# Altium PCB RS_RF02.PcbDoc
Units mm, origin at the board's own origin, x right, y up, seen from the top; angles counter-clockwise.
Board outline 43 x 71 mm, 2 copper layers (Top Layer, Bottom Layer); 80 components, 52 nets, 269 pads, 197 vias.
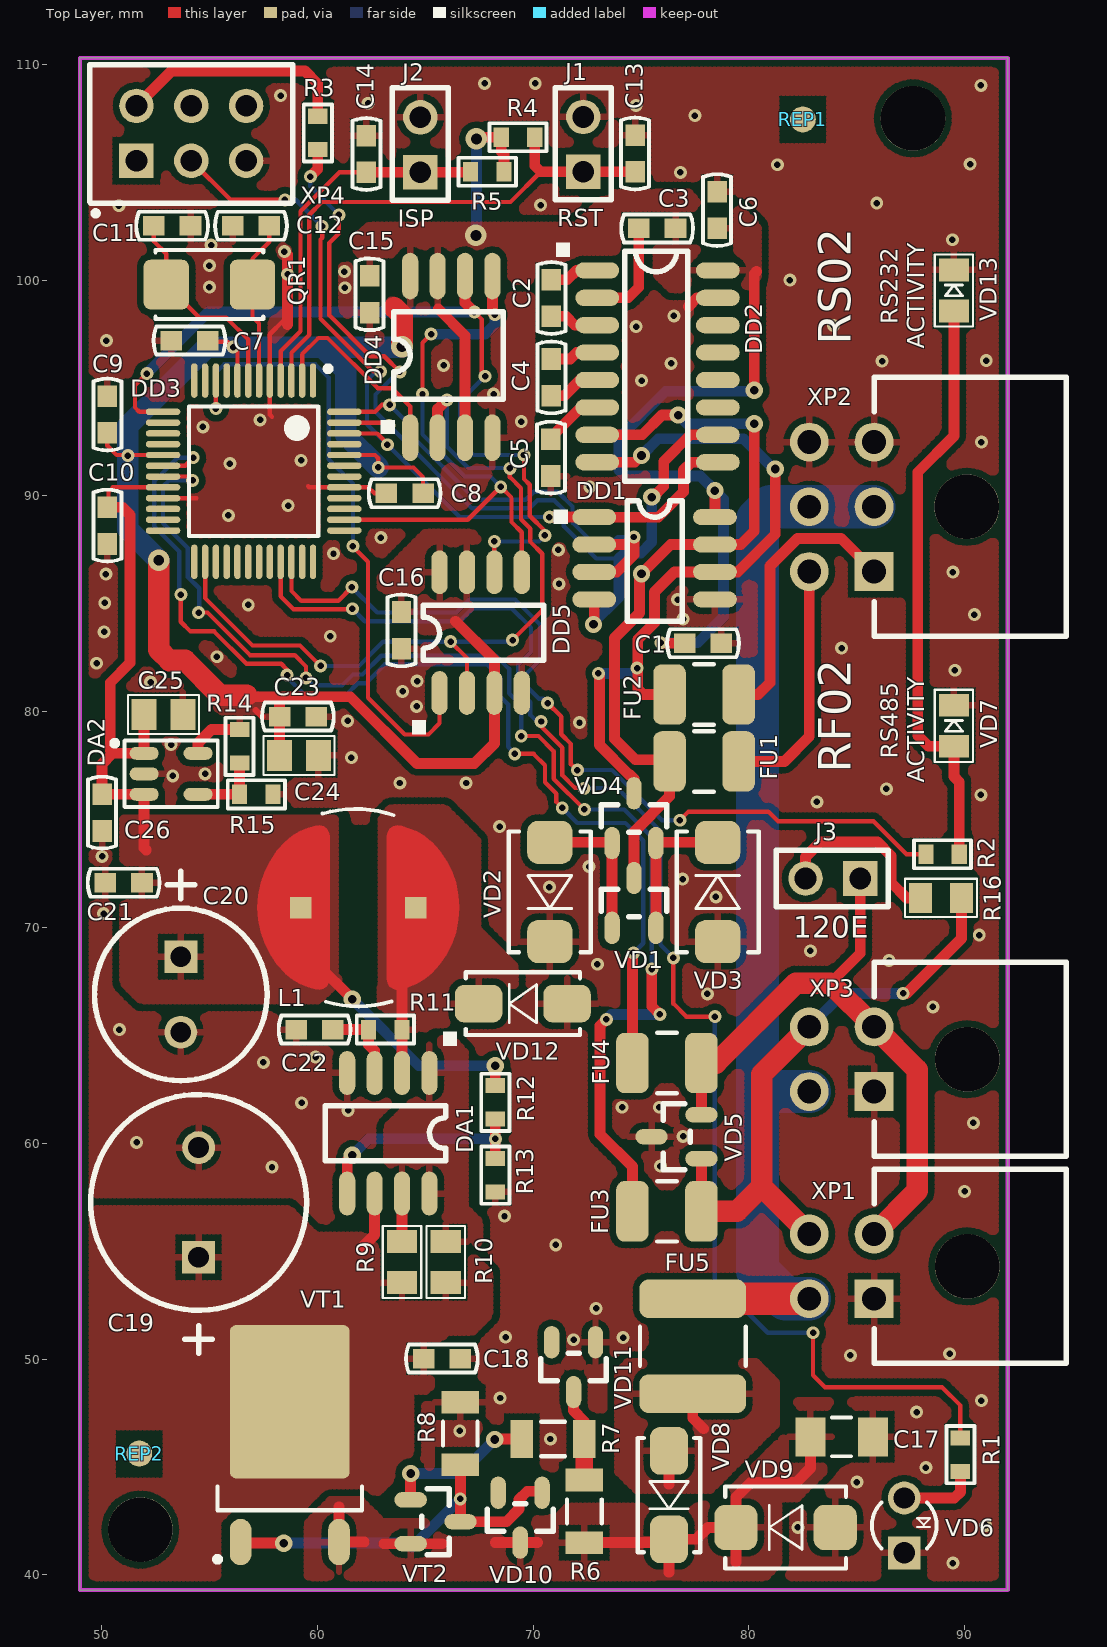
[diagram p0: Top Layer view]
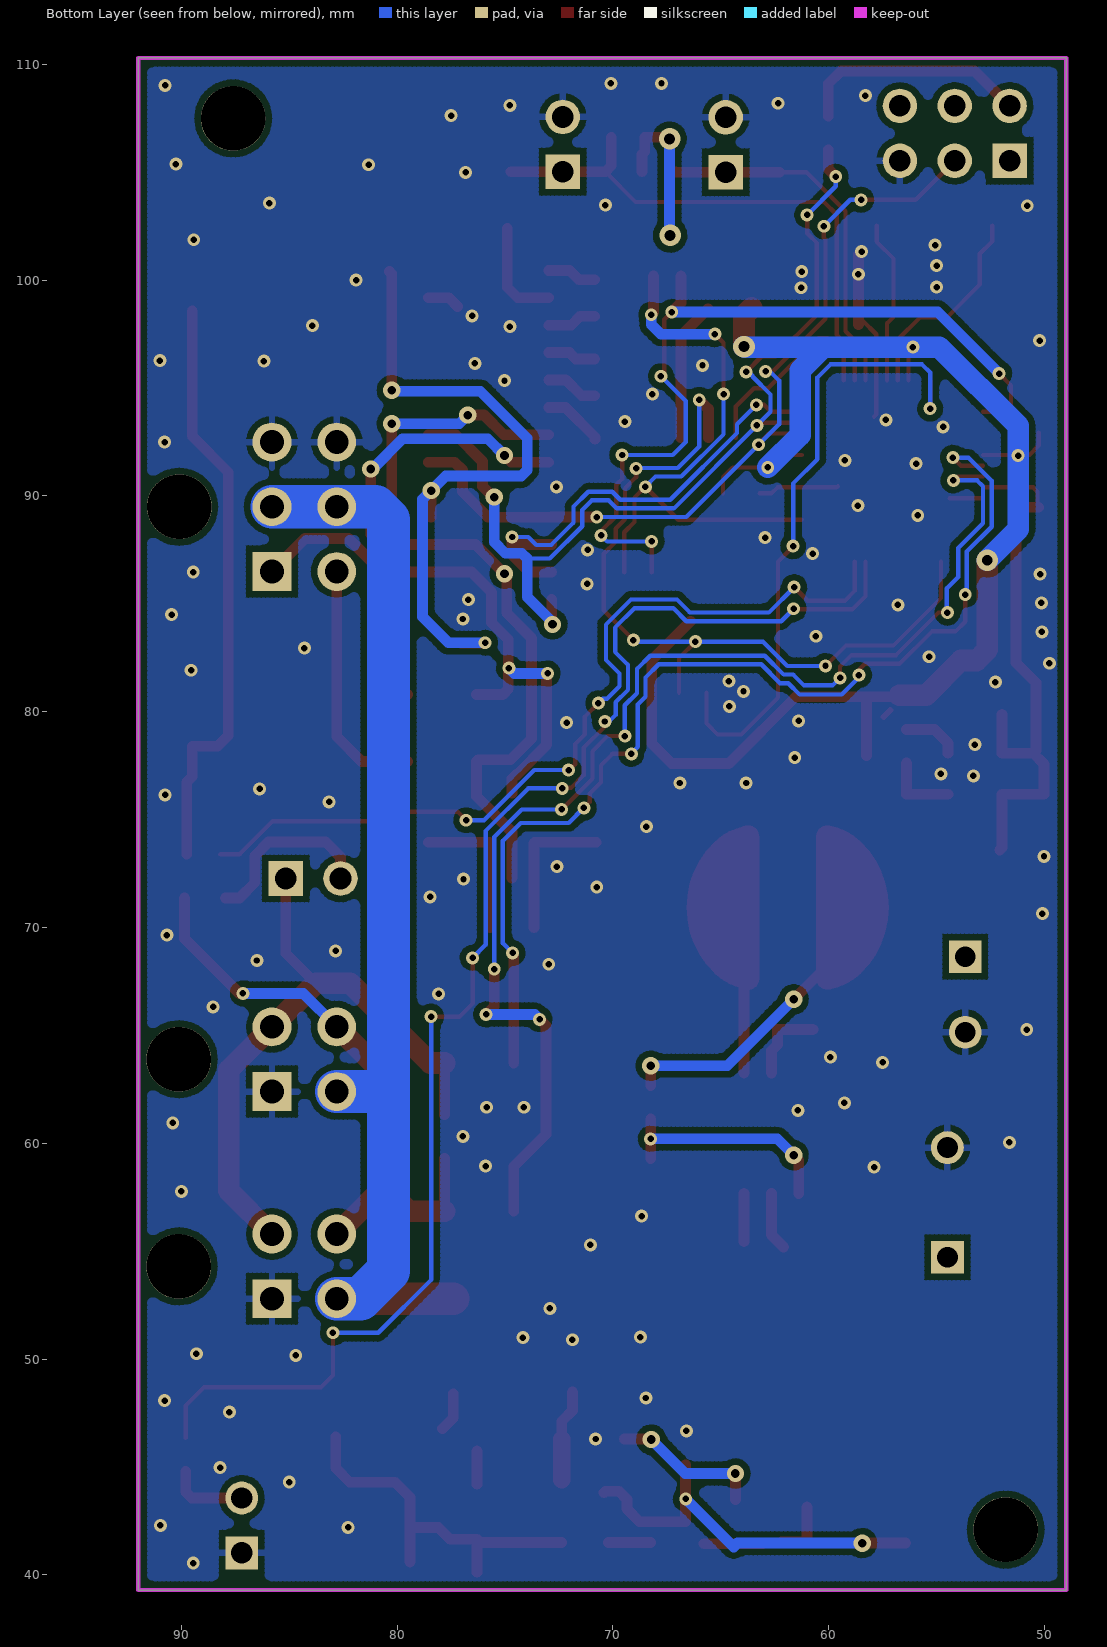
[diagram p1: Bottom Layer view, seen from below]

## Layer stack, top to bottom
Top Solder: solder mask 0.0102, Solder Resist, Dk 3.5
Top Layer: signal copper 0.0356
Dielectric 1: dielectric 0.32, FR-4, Dk 4.8
Bottom Layer: signal copper 0.0356
Bottom Solder: solder mask 0.0102, Solder Resist, Dk 3.5

## Board outline
49,39.3 49,110.3 92,110.3 92,39.3

## Design rules (kind name [scope] priority, off if disabled: settings)
Clearance Clearance_1 [InPolygon] p1: gap=0.3 ignorepadtopadclearanceinfootprint=FALSE
Clearance [All] p2: gap=0.2 ignorepadtopadclearanceinfootprint=FALSE
HoleSize [All] p1: absolutevalues=TRUE maxlimit=10 minlimit=0.025 maxpercent=80.000 minpercent=20.000
HoleToHoleClearance [All] p1: gap=0.2 allowstackedmicrovias=TRUE
MinimumSolderMaskSliver [All] p1: minsoldermaskwidth=0.05
PolygonConnect PolygonConnect_1 [IsVia OR InComponent('VT1') AND InNet('VIN_F')] p1: connectstyle=Direct reliefconductorwidth=0.254 reliefentries=4 polygonreliefangle="90 Angle" airgapwidth=0.254
PolygonConnect [All] p2: connectstyle=Relief reliefconductorwidth=0.3 reliefentries=4 polygonreliefangle="90 Angle" airgapwidth=0.3
RoutingVias [All] p1: holewidth=0.4 width=0.8 viastyle="Through Hole" minholewidth=0.3 minwidth=0.6 maxholewidth=0.5 maxwidth=1
SilkToSilkClearance [All] p1: silktosilkclearance=0.1
SilkToSolderMaskClearance [IsPad] p1: minsilkscreentomaskgap=0.1 clearancetoexposedcopper=TRUE
SolderMaskExpansion [All] p1: expansion=0.102
Width [All] p1: maxlimit=3 minlimit=0.2 preferedwidth=0.5
25 further rules are at their usual default settings.

## Classes and differential pairs
component class Power: C17 C18 C19 C20 C21 C22 C23 C24 C25 C26 DA1 DA2 FU5 L1 R6 R7 R8 R9 R10 R11 R12 R13 R14 R15 VD8 VD9 VD10 VD11 VD12 VT1 VT2
component class Memory: C15 C16 DD4 DD5
component class MCU: C7 C8 C9 C10 C11 C12 C13 C14 DD3 J1 J2 QR1 R1 R2 R3 R4 R5 REP1 REP2 VD6 VD7 VD13 XP4
component class Interface: C1 C2 C3 C4 C5 C6 DD1 DD2 FU1 FU2 FU3 FU4 J3 R16 VD1 VD2 VD3 VD4 VD5 XP1 XP2 XP3

## Components (designator, comment, footprint, x,y, rotation, side; value= is the part's Value field where it differs from the comment)
C1 "0.1uF" CC0603 77.875,83.175 r0 top
C2 "0.1uF" CC0603 70.85,99.175 r90 top
C3 "0.1uF" CC0603 75.75,102.4 r0 top
C4 "0.1uF" CC0603 70.85,95.5 r90 top
C5 "0.1uF" CC0603 70.825,91.775 r270 top
C6 "0.1uF" CC0603 78.525,103.25 r270 top
C7 "0.1uF" CC0603 54.075,97.2 r0 top
C8 "0.1uF" CC0603 64.05,90.125 r180 top
C9 "0.1uF" CC0603 50.273,93.775 r270 top
C10 "0.1uF" CC0603 50.275,88.625 r90 top
C11 "22pF" CC0603 53.275,102.525 r180 top
C12 "22pF" CC0603 56.925,102.523 r0 top
C13 "200pF" CC0603 74.725,105.875 r270 top
C14 "200pF" CC0603 62.275,105.85 r270 top
C15 "0.1uF" CC0603 62.425,99.35 r270 top
C16 "0.1uF" CC0603 63.9,83.775 r270 top
C17 "0.1uF" CC1206 84.3,46.4 r180 top
C18 "0.1uF" CC0603 65.775,50.025 r180 top
C19 "470uFx35V" CC16X10_CAP0.5(1)(Primary) 54.5,54.725 r90 top
C20 "1000uFx6.3V" CC8X3.5 53.675,68.65 r270 top
C21 "0.1uF" CC0603 51.025,72.075 r0 top
C22 "300pF" CC0603 59.875,65.275 r0 top
C23 "0.1uF" CC0603 59.1,79.775 r0 top
C24 "10uFx6.3V" CC0805 59.15,77.975 r180 top
C25 "4.7uF 6.3V" CC0805 52.875,79.875 r180 top
C26 "0.1uF" CC0603 50.025,75.325 r270 top
DA1 "MC34063" SO-8 65.195,63.263 r180 top
DA2 "AP2210K-ADJTRG1" SOT23-5 53.225,77.125 r0 top
DD1 "ST3485EBDR" SO-8 72.837,89.02 r270 top
DD2 "MAX3232" SO16_M 72.975,100.455 r0 top
DD3 "LPC11C24FBD48" LQFP-48 57.05,91.15 r270 top
DD4 "M25PE16" EIAJ_SO8 64.305,92.7 r90 top
DD5 "FM25CL64-G" SO-8 65.665,80.875 r0 top
FU1 "MICROSMD010F" RC1210 77.925,77.7 r0 top
FU2 "MICROSMD010F" RC1210 77.925,80.8 r0 top
FU3 "MICROSMD010F-2" RC1210 76.2,56.85 r180 top
FU4 "MICROSMD010F-2" RC1210 76.2,63.725 r180 top
FU5 "MF-SMDF050" MF-SMDF 77.4,50.6 r270 top
J1 "PLS-02" PLS-02 72.325,105.025 r90 top
J2 "PLS-02" PLS-02 64.775,105.01 r90 top
J3 "PLS-02" PLS-02 85.165,72.275 r180 top
L1 "220uH" SDR0805 61.9,70.925 r0 top
QR1 "NX5032GA-12.000MHz LN-CD-1" AC5032_2 55,99.8 r180 top
R1 "330E" RC0603 89.8,45.575 r270 top
R2 "330E" RC0603 88.975,73.4 r0 top
R3 "100E" RC0603 60.025,106.825 r90 top
R4 "10k" RC0603 69.3,106.625 r180 top
R5 "10k" RC0603 67.875,105.025 r0 top
R6 "220k" RC1206 72.375,42.95 r270 top
R7 "220k" RC1206 70.925,46.3 r180 top
R8 "220k" RC1206 66.625,46.55 r90 top
R9 "1E" RC0805 63.925,54.5 r270 top
R10 "1E" RC0805 65.95,54.5 r270 top
R11 "560k" RC0603 63.15,65.275 r180 top
R12 "3k 1%" RC0603 68.25,61.9 r270 top
R13 "1k 1%" RC0603 68.25,58.525 r90 top
R14 "11k 1%" RC0603 56.4,78.4 r90 top
R15 "18k 1%" RC0603 57.175,76.175 r180 top
R16 "120E" RC0805 88.9,71.375 r0 top
REP1 "REPER_POINT_1.2" REPER1.2 82.5,107.45 r90 top
REP2 "REPER_POINT_1.2" REPER1.2 51.75,45.625 r90 top
VD1 "BAV99" SOT-23(GSD) 73.659,69.976 r0 top
VD2 "SMBJ5.0A" SMB 70.775,71.65 r90 top
VD3 "SMBJ5.0A" SMB 78.55,71.65 r270 top
VD4 "BAV99" SOT-23(GSD) 73.659,73.901 r0 top
VD5 "PESD2CAN" SOT-23(123) 77.813,59.293 r0 top
VD6 "BL-B45V1-L" LED3 87.2,41.025 r90 top
VD7 "BL-HGE35A-AV-TRB" LED0805 89.5,78.4 r90 top
VD8 "GS1M" SMA 76.3,43.7 r270 top value={Value}
VD9 "SMBJ150A" SMB 81.7,42.2 r0 top
VD10 "BZX84C15" SOT-23(123) 70.416,43.824 r90 top value={Value}
VD11 "BZX84C39" SOT-23(123) 72.891,50.799 r90 top value={Value}
VD12 "SS14" SMA 69.525,66.475 r180 top
VD13 "n.p" LED0805 89.5,98.575 r90 top
VT1 "FQD5P20TM" D-PAK(TO-252AA) 58.725,46.025 r90 top
VT2 "BC807-40" SOT-23(123) 64.312,43.482 r180 top
XP1 "MIF2X02PRP" MIF2X02PRP 85.8,52.8 r0 top
XP2 "MIF2X03PRP" MIF2X03PRP 85.8,86.5 r0 top
XP3 "MIF2X02PRP" MIF2X02PRP 85.8,62.4 r0 top
XP4 "PLD-06" PIN6 51.62,105.535 r0 top

## Footprints (in the part's own frame and the unit in brackets; to place one, negate y for a bottom-side part, rotate by r counter-clockwise, add the part's x,y. Pads: shape width x height; smd on the part's side, far side on the other; paste and mask are expansions set on the pad)
AC5032_2 [mm]
  rrect30% 2.1x2.3 smd mask+0.05: 1(-2,0) 2(2,0)
  silkscreen extent -2.5,-1.6 2.5,1.6
CC8X3.5 [mil]
  rect 60x60 hole 38 mask+1.97: 1(0,0)
  round 60 hole 38 mask+1.97: 2(137.8,0)
  silkscreen extent -156,-157 226,157
CC16X10_CAP0.5(1)(Primary) [mil]
  round 60 hole 38 mask+1.97: 1(200,0)
  rect 60x60 hole 38 mask+1.97: 2(0,0)
  silkscreen extent -175,-197 297,197
CC0603 [mm]
  rect 1x0.9 smd paste-25.4 mask+0.05: 1(-0.85,0) 2(0.85,0)
  silkscreen extent -1.66,-0.65 1.66,0.65
CC0805 [mm]
  rect 1.15x1.45 smd paste-25.4 mask+0.05: 1(-0.9,0) 2(0.9,0)
  silkscreen extent -1.65,-0.9 1.65,0.9
CC1206 [mm]
  rect 1.4x1.8 smd paste-25.4 mask+0.05: 1(-1.45,0) 2(1.45,0)
  silkscreen extent -0.45,-0.9 0.45,0.9
D-PAK(TO-252AA) [mm]
  oval 2.15x1 smd paste+0.076 mask+0.076: 1(-4.5,2.28) 3(-4.5,-2.28)
  rrect10% 7.1x5.55 smd paste-4: 2(2,0)
  silkscreen extent -5.42,-3.35 -1.92,3.47
EIAJ_SO8 [mil]
  oval 85x29.53 smd mask+1.97: 1(0,0) 2(0,-50) 3(0,-100) 4(0,-150) 5(295,-150) 6(295,-100) 7(295,-50) 8(295,0)
  silkscreen extent 7,-170 230,53
LED3 [mil]
  rect 60x60 hole 39 mask+1.97: 1(0,0)
  round 60 hole 39 mask+1.97: 2(100,0)
  silkscreen extent 8,-59 92,59
LED0805 [mm]
  rect 1.05x1.4 smd paste-25.4 mask+0.05: 1(0,0) 2(1.9,0)
  silkscreen extent -0.72,-0.89 2.62,0.89
LQFP-48 [mm]
  oval 1.6x0.3 smd mask+0.05: 1(-4.2,2.75) 2(-4.2,2.25) 3(-4.2,1.75) 4(-4.2,1.25) 5(-4.2,0.75) 6(-4.2,0.25) 7(-4.2,-0.25) 8(-4.2,-0.75) 9(-4.2,-1.25) 10(-4.2,-1.75) 11(-4.2,-2.25) 12(-4.2,-2.75) 25(4.2,-2.75) 26(4.2,-2.25) 27(4.2,-1.75) 28(4.2,-1.25) 29(4.2,-0.75) 30(4.2,-0.25) 31(4.2,0.25) 32(4.2,0.75) 33(4.2,1.25) 34(4.2,1.75) 35(4.2,2.25) 36(4.2,2.75)
  oval 0.3x1.6 smd mask+0.05: 13(-2.75,-4.2) 14(-2.25,-4.2) 15(-1.75,-4.2) 16(-1.25,-4.2) 17(-0.75,-4.2) 18(-0.25,-4.2) 19(0.25,-4.2) 20(0.75,-4.2) 21(1.25,-4.2) 22(1.75,-4.2) 23(2.25,-4.2) 24(2.75,-4.2) 37(2.75,4.2) 38(2.25,4.2) 39(1.75,4.2) 40(1.25,4.2) 41(0.75,4.2) 42(0.25,4.2) 43(-0.25,4.2) 44(-0.75,4.2) 45(-1.25,4.2) 46(-1.75,4.2) 47(-2.25,4.2) 48(-2.75,4.2)
  silkscreen extent -4.87,-3 3,3.58
MF-SMDF [mm]
  rrect50% 1.8x4.95 smd mask+0.05: 1(-2.2,0) 2(2.2,0)
  silkscreen extent -0.9,-2.45 0.9,2.45
MIF2X02PRP [mm]
  rect 1.8x1.8 hole 1.1 mask+0.05: 1(0,0)
  round 1.8 hole 1.1 mask+0.05: 2(0,3) 3(-3,0) 4(-3,3)
  round 3 hole 3 unplated mask+0.05: 5(4.32,1.5)
  silkscreen extent 0,-3 8.9,6
MIF2X03PRP [mm]
  rect 1.8x1.8 hole 1.1 mask+0.05: 1(0,0)
  round 1.8 hole 1.1 mask+0.05: 2(0,3) 3(0,6) 4(-3,0) 5(-3,3) 6(-3,6)
  round 3 hole 3 unplated mask+0.05: 7(4.3,3)
  silkscreen extent 0,-3 8.9,9
PIN6 [mm]
  rect 1.6x1.6 hole 1 mask+0.05: 1(0,0)
  round 1.6 hole 1 mask+0.05: 2(0,2.54) 3(2.54,0) 4(2.54,2.54) 5(5.08,0) 6(5.08,2.54)
  silkscreen extent -2.16,-1.96 7.24,4.44
PLS-02 [mm]
  rect 1.6x1.6 hole 1 mask+0.05: 1(0,0)
  round 1.6 hole 1 mask+0.05: 2(2.54,0)
  silkscreen extent -1.3,-1.3 3.9,1.3
RC0603 [mm]
  rect 0.7x0.9 smd paste-25.4 mask+0.05: 1(-0.775,0) 2(0.774,0)
  silkscreen extent -1.32,-0.65 1.33,0.65
RC0805 [mm]
  rect 1.05x1.4 smd paste-25.4 mask+0.05: 1(-0.95,0) 2(0.95,0)
  silkscreen extent -1.67,-0.89 1.67,0.89
RC1206 [mm]
  rect 1.05x1.75 smd paste-25.4 mask+0.05: 1(-1.45,0) 2(1.45,0)
  silkscreen extent -0.55,-0.8 0.55,0.8
RC1210 [mm]
  rrect50% 1.5x2.8 smd mask+0.05: 1(-1.6,0) 2(1.6,0)
  silkscreen extent -0.45,-1.4 0.45,1.4
REPER1.2 [mm]
  round 1.2 smd paste-25.4 mask+0.05: 1(0,0)
  Top Layer pour cut-out: -1.35,-1.325 1.325,-1.325 1.325,1.325 -1.35,1.325
SDR0805 [mm]
  rect 1x1 smd paste-25.4 mask+0.05: 1(-2.667,0) 2(2.667,0)
  Top Layer region: -1.327,3.319 -1.362,3.503 -1.461,3.66 -1.612,3.771 -1.792,3.818 -1.977,3.797 -2.318,3.69 -2.706,3.535 -3.065,3.321 -3.387,3.053 -3.392,3.047 -3.771,2.627 -4.09,2.16 -4.345,1.654 -4.53,1.119 -4.642,0.565 -4.68,0 -4.642,-0.565 -4.53,-1.119 -4.345,-1.654 -4.09,-2.16 -3.771,-2.627 -3.392,-3.047 -3.381,-3.059 -3.063,-3.323 -2.709,-3.534 -2.325,-3.688 -1.996,-3.791 -1.806,-3.813 -1.62,-3.764 -1.465,-3.65 -1.363,-3.488 -1.327,-3.299
  Top Layer region: 1.327,-3.319 1.362,-3.503 1.461,-3.66 1.612,-3.771 1.792,-3.818 1.977,-3.797 2.318,-3.69 2.706,-3.535 3.065,-3.321 3.387,-3.053 3.392,-3.047 3.771,-2.627 4.09,-2.16 4.345,-1.654 4.53,-1.119 4.642,-0.565 4.68,0 4.642,0.565 4.53,1.119 4.345,1.654 4.09,2.16 3.771,2.627 3.392,3.047 3.381,3.059 3.063,3.323 2.709,3.534 2.325,3.688 1.996,3.791 1.806,3.813 1.62,3.764 1.465,3.65 1.363,3.488 1.327,3.299
  silkscreen extent -1.66,-4.57 1.64,4.57
SMA [mm]
  rrect50% 2.2x1.75 smd mask+0.05: 1(-2.05,0) 2(2.05,0)
  silkscreen extent -2.65,-1.45 2.65,1.45
SMB [mm]
  rrect50% 2x2.1 smd mask+0.05: 1(2.3,0) 2(-2.3,0)
  silkscreen extent -2.8,-1.9 2.8,1.9
SO16_M [mil]
  oval 80x29.53 smd mask+1.97: 1(0,0) 2(0,-50) 3(0,-100) 4(0,-150) 5(0,-200) 6(0,-250) 7(0,-300) 8(0,-350) 9(220,-350) 10(220,-300) 11(220,-250) 12(220,-200) 13(220,-150) 14(220,-100) 15(220,-50) 16(220,0)
  silkscreen extent -75,-385 165,50
SO-8 [mil]
  oval 29.53x80 smd mask+1.97: 1(0,0) 2(50,0) 3(100,0) 4(150,0) 5(150,220) 6(100,220) 7(50,220) 8(0,220)
  silkscreen extent -50,-75 190,160
SOT23-5 [mm]
  oval 1.35x0.6 smd mask+0.05: 1(-1.25,0.95) 2(-1.25,0) 3(-1.25,-0.95) 4(1.25,-0.95) 5(1.25,0.95)
  silkscreen extent -2.74,-1.55 2.16,1.55
SOT-23(123) [mil]
  oval 59.06x28.07 smd mask+1.97: 1(-0.5,0) 2(-0.5,80) 3(-91.5,40)
  silkscreen extent -70,-20 -20,100
SOT-23(GSD) [mil]
  oval 28.07x59.06 smd mask+1.97: 1(0,0.5) 2(80,0.5) 3(40,91.5)
  silkscreen extent -20,20 100,70

## Part data
C1 C2 C3 C4 C5 C6 C7 C8 C9 C10 C11 C12 C13 C14 C15 C16 C18 C21 C22 C23 C26: library part CC0603, "CC0603"
C17: library part CC1206, "CC1206"
C19: library part CAP0.5(1), "CAP0.5(1)"
C20: library part CAP0.35, "CAP0.35"
C24 C25: library part CC0805, "CC0805"
DA2: library part MCP1824T-ADJE/OT, "300 mA, Low Voltage, Low Quiescent Current LDO Regulator, 5-Pin SOT-223, Extended Temperature, Tape and Reel", ComponentLink1Description="Manufacturer Link", ComponentLink1URL=http://www.microchip.com, ComponentLink2Description=Datasheet, ComponentLink2URL=http://ww1.microchip.com/downloads/en/DeviceDoc/22070a.pdf, ComponentLink3Description="Packaging Specification", ComponentLink3URL=http://ww1.microchip.com/downloads/en/PackagingSpec/00049AW.pdf, DatasheetVersion="revA, Aug-2007", PackageDescription="5-Lead Plastic Small Outline Transistor (DC) [SOT-223]", PackageReference=SOT-223-DC5, PackageVersion="revAW, Oct-2008", Published=29-Jan-2009, Publisher="Altium Limited"
DD1: library part SP485, "SP485"
DD2: library part ST232BD/CD, "ST232BD/CD"
DD4: library part S25FL016A0LMFI01, "S25FL016A0LMFI01"
FU1 FU2 FU3 FU4: library part MICROSMD, "MICROSMD"
FU5: library part MF-SMDF, "MF-SMDF"
L1: library part SDR0805, "SDR0805"
QR1: library part AC5032_2, "AC5032/2"
R1 R2 R3 R4 R5 R11 R12 R13 R14 R15: library part RC0603, "RC0603"
R6 R7 R8: library part RC1206, "RC1206"
R9 R10 R16: library part RC0805, "RC0805"
REP1 REP2: library part REPER1.2, "REPER1.2"
VD1 VD4: "1.0 Ampere General Purpose Rectifier", ComponentField6="Published 8-Jun-2000, Modified 11-July-2000: SIM Model Added."
VD2 VD3 VD9: library part SMBJ, "SMBJ"
VD5: "TVS for CAN"
VD6: library part LED_3, "LED_3"
VD7 VD13: library part LED_0805
VD10 VD11: library part BZX84, "Zener Voltage Regulator Diode"
VD12: "Schottky Rectifier", ComponentField6="Published 8-Jun-2000, Modified 10-July-2000: SIM Model Added.", OriginalName=10BQ100
VT1: library part IRFR9220, "HEXFET Power MOSFET", ComponentField7="Published 8-Jun-2000", OriginalName=IRLML5103
VT2: library part BC857B, "BC857B", ComponentField7="Published 29-Sep-2000", OriginalName=BC846BLT1
XP2: "MIF2x03PRP"
XP4: "PLD06"

## Free pads (board coordinates)
  round 3 hole 3 mask+0.05: 0(51.8,42.1) 0(87.6,107.5)

## Via types
v1: diameter 0.6, hole 0.3, Top Layer to Bottom Layer, 178 vias
v2: diameter 0.8, hole 0.4, Top Layer to Bottom Layer, 15 vias
v3: diameter 1, hole 0.5, Top Layer to Bottom Layer, 4 vias

## Nets (pads, with @x,y where several pads share a name; then routed paths per layer and width w, separated by ;. In a path a pad name is that pad's centre, name@x,y a point inside that pad or via, vN(x,y) a via of type N, cw(c..) or ccw(c..) an arc to the next point about the centre after c; other vN are vias at no path point)
+3V3: C1.1 C3.2 C6.2 C7.2 C8.1 C9.2 C15.1 C16.1 C23.1 C24.2 DA2.5 DD1.8 DD2.16 DD3.8 DD3.17 DD3.44 DD4.3 DD4.7 DD4.8 DD5.3 DD5.7 DD5.8 R4.2 R5.2 R14.2 | length 120.1
  Top Layer w0.2: C9.2 50.273,92.327 50.7,91.9 DD3.17 ; C7.2 54.975,97.15 55.825,97.15 56.3,96.675 DD3.8 ; DD3.44 62.675,91.9 62.825,91.75 v1(62.825,91.325) 62.829,91.321 64.454,91.321 64.9,90.875 C8.1
  Top Layer w0.3: 57.151,80.074 57.45,79.775
  Top Layer w0.5: DA2.5 54.475,78.55 55.099,79.174 R14.2 ; 56.725,80.775 56.8,80.7 58.25,80.7 ; C24.2 C23.1 58.25,80.7 ; 65.6,98.675 66.845,97.43 DD4.3 ; 66.4,84.2 68.205,82.395 DD5.3 68.205,78.53 67.275,77.6 64.625,77.6 61.525,80.7 58.25,80.7 ; v3(67.375,106.55) 67.45,106.625 R4.2 68.526,105.949 68.649,105.826 R5.2 ; v1(75.925,83.2) 75.95,83.175 C1.1 ; DD1.8 v2(78.425,90.25) ; v2(80.25,94.9) 80.25,100.3 80.35,100.4
  Top Layer w1: v3(52.65,87.025) 52.65,82.875 53.15,82.375 53.875,82.375 55.475,80.775 56.725,80.775 ; 63.575,98.725 63.925,98.375 v3(63.925,96.925)
  Bottom Layer w0.5: v3(67.35,102.075) 67.375,102.1 v3(67.375,106.55) ; v1(75.925,83.2) 77.625,83.2 78.825,84.4 78.825,89.85 v2(78.425,90.25) 77.75,90.925 74.25,90.925 73.975,91.2 73.975,92.675 76.15,94.85 80.2,94.85 v2(80.25,94.9)
  Bottom Layer w1: v3(52.65,87.025) 51.225,88.45 v1(51.225,91.875) 51.225,93.25 54.875,96.9 v1(56.1,96.9) 60.25,96.9 ; v1(62.825,91.325) 61.325,92.825 61.325,95.825 60.25,96.9 ; v3(63.925,96.925) 63.9,96.9 60.25,96.9
+5V: C10.2 C20.1 C21.2 C25.2 C26.1 DA2.1 DA2.3 DD3.20 L1.1 R12.1 | length 37.1
  Top Layer w0.2: C10.2 50.325,89.525 50.325,90.2 50.525,90.4 DD3.20
  Top Layer w0.5: C10.2 50.975,89.475 51.325,89.125 51.325,82.275 50.4,81.35 50.4,78.2 50.525,78.075 ; C25.2 DA2.1 50.525,78.075 ; 52.075,73.6 51.975,73.7 DA2.3 C26.1 50.025,77.575 50.525,78.075 ; 59.95,68.35 v2(61.625,66.675) ; R12.1 v2(68.25,63.6)
  Bottom Layer w0.5: v2(61.625,66.675) 64.7,63.6 v2(68.25,63.6)
A/RXD_int: DD1.6 DD2.8 FU2.1 VD4.3 | length 33.6
  Top Layer w0.5: DD2.8 74.715,91.565 v2(75.025,91.875) ; v1(73.025,81.775) 73.075,81.725 73.075,78.46 74.46,77.075 74.5,77.075 74.675,76.9 VD4.3 ; FU2.1 75.1,80.8 74.85,81.05 74.85,83.35 75.625,84.125 75.625,85.55 76.555,86.48 DD1.6 79.48,86.48 81.225,88.225 v2(81.225,91.25)
  Bottom Layer w0.5: v1(73.025,81.775) 74.575,81.775 v1(74.825,82.025) ; v2(75.025,91.875) 75.8,92.65 79.748,92.65 81.148,91.25 v2(81.225,91.25)
B/TXD_int: DD1.7 DD2.7 FU1.1 VD1.3 | length 36.1
  Top Layer w0.5: DD2.7 75.06,92.835 75.975,93.75 v2(76.725,93.75) ; VD1.3 74.675,74.432 76.325,76.082 FU1.1 76.25,77.775 74.75,77.775 73.775,78.75 73.775,83.425 74.925,84.575 74.925,86.3 v2(75.025,86.4) 76.375,87.75 DD1.7 79.625,87.75 80.25,88.375 v2(80.25,93.35)
  Bottom Layer w0.5: v2(76.725,93.75) 77.125,93.35 v2(80.25,93.35)
CAN_CON: DD3.33 R1.1 | length 67.2
  Top Layer w0.2: DD3.33 58.3,85.35 58.9,84.75 61.6,84.75 v1(61.625,84.775) ; v1(70.375,79.55) 70.375,79.316 71.35,78.341 71.35,77.066 71.941,76.475 v1@72.325,76.475 ; v1(76.5,68.6) 76.5,66.475 77.1,65.875 v1(78.425,65.875) ; v1(82.975,51.225) 82.975,49.25 83.525,48.7 88.95,48.7 89.8,47.85 R1.1
  Bottom Layer w0.2: v1(61.625,84.775) 62.2,84.2 66.6,84.2 67.2,84.8 69,84.8 69.9,83.9 69.9,82.775 69.3,82.175 69.3,81.016 69.875,80.441 69.875,79.85 70.325,79.4 70.325,79.5 v1(70.375,79.55) ; v1(72.35,76.45) 73.925,76.45 75.9,74.475 75.9,69.2 v1(76.5,68.6) ; v1(78.425,65.875) 78.425,53.675 80.875,51.225 v1(82.975,51.225)
CANH: FU3.1 R16.2 VD5.1 XP1.4 XP3.4 | length 27.8
  Top Layer w0.5: FU3.1 VD5.1 ; v1(87.15,66.95) 87.3,66.95 89.85,69.5 R16.2
  Top Layer w1: FU3.1 79.45,56.85 80.6,58 ; XP1.4 80.6,58 ; XP3.4 80.6,63.2 80.6,58
  Bottom Layer w0.5: XP3.4 84.35,66.95 v1(87.15,66.95)
CANL: FU4.1 J3.1 VD5.2 XP1.2 XP3.2 | length 29.5
  Top Layer w0.5: VD5.2 FU4.1 ; 83.775,67.425 85.165,68.815 J3.1
  Top Layer w1: FU4.1 78.475,63.725 82.175,67.425 83.775,67.425 XP3.2 87.8,63.4 87.8,57.8 XP1.2
GND: C1.2 C5.2 C6.1 C7.1 C8.2 C9.1 C10.1 C11.1 C12.1 C13.1 C14.1 C15.2 C16.2 C17.1 C18.1 C19.1 C20.2 C21.1 C22.1 C23.2 C24.1 C25.1 C26.2 DA1.4 DA2.2 DD1.5 DD2.15 DD3.5 DD3.21 DD3.41 DD4.4 DD5.4 J1.2 J2.2 R8.2 R13.1 R15.1 VD2.2 VD3.1 VD5.3 VD6.1 VD7.2 VD9.1 VD11.1 VD12.1 VD13.2 XP1.1 XP2.3 XP2.6 XP3.1 XP4.5 | length 15
  Top Layer w0.2: DD3.21 54.393,89.9 54.4,89.893 ; 57.9,93.675 57.8,93.775 DD3.5 57.8,97.5 58.438,98.138 ; 59.575,90.45 59.625,90.4 DD3.41 62.375,90.4 62.65,90.125 C8.2
  Top Layer w0.5: v1(58.475,101.325) 58.625,101.175 v1(58.625,100.275) 58.625,97.951 ; 77.2,98.786 77.599,99.185 DD2.15
  other v1: 89.45,40.55 82.275,42.2 90.975,42.3 85,44.304 88.2,44.975 70.8,46.3 66.6,46.675 87.775,47.55 90.775,48.075 68.475,48.2 84.7,50.175 89.3,50.25 71.875,50.9 74.175,51 68.725,51.025 72.925,52.35 71.05,55.3 68.675,56.625 90,57.775 57.9,58.9 75.9,58.95 51.625,60.05 76.95,60.325 90.4,60.95 61.425,61.525 74.125,61.675 75.85,61.675 59.275,61.875 57.5,63.75 59.925,64 50.825,65.275 88.525,66.325 78.075,66.925 72.975,68.3 86.5,68.475 82.85,68.925 90.675,69.65 50.1,70.65 78.475,71.425 70.75,71.875 76.925,72.25 72.6,72.825 50.025,73.3 68.45,74.675 83.15,75.825 90.75,76.15 86.375,76.425 63.825,76.7 66.9,76.7 53.3,77.025 54.8,77.125 61.575,77.875 53.225,78.475 72.15,79.5 61.4,79.575 64.6,80.25 63.95,80.95 52.275,81.375 64.625,81.425 89.55,81.925 49.775,82.25 55.35,82.55 84.3,82.95 60.6,83.5 50.125,83.7 76.95,84.3 90.45,84.5 56.8,84.95 50.15,85.05 76.7,85.2 71.2,85.925 50.2,86.375 89.45,86.475 60.75,87.325 71.175,87.5 62.95,88.075 55.875,89.1 58.65,89.55 72.625,90.425 55.95,91.5 59.25,91.65 90.775,92.5 54.7,93.2 69.45,93.45 57.35,93.525 68.175,94.725 75.025,95.35 65.85,96.05 76.4,96.15 86.175,96.25 91,96.275 50.225,97.2 74.775,97.85 83.925,97.9 76.525,98.35 61.275,99.65 55,99.675 81.9,100 61.25,100.4 55,100.675 55.075,101.625 89.425,101.875 50.8,103.45 70.35,103.475 85.925,103.575 76.825,105 81.325,105.35 90.25,105.375 77.5,107.625 74.775,108.1 62.35,108.2 58.3,108.55 90.75,109.025 67.75,109.125 70.1,109.125
ISP_Start: C14.2 DD3.4 J2.1 R5.1 | length 16.9
  Top Layer w0.2: DD3.4 58.3,96.706 59.225,97.631 59.225,103.2 61.025,105 C14.2
  Top Layer w0.5: C14.2 67.075,105 R5.1
MISO0: DD3.27
MISO1: DD3.26 DD4.2 DD5.2 | length 37
  Top Layer w0.2: DD3.26 54.8,85.275 57,83.075 59.2,83.075 v1(60.15,82.125) ; v1(66.175,83.25) 66.935,82.49 DD5.2 ; v1(68.925,91.275) 68.925,90.875 69.443,90.357 69.443,88.918 69.875,88.486 69.875,87.875 70.425,87.325 70.425,84.7 v1(69.05,83.325)
  Top Layer w0.5: DD4.2 65.575,94.025 v1(66,94.45)
  Bottom Layer w0.2: v1(60.15,82.125) 61.925,82.125 63.05,83.25 v1(66.175,83.25) 68.975,83.25 v1(69.05,83.325) ; v1(66,94.45) 66,92.297 66.997,91.3 68.9,91.3 v1(68.925,91.275)
MOSI0: DD3.28
MOSI1: DD3.38 DD4.5 DD5.5 | length 27.1
  Top Layer w0.2: DD3.38 66.975,88.9 v1(68.5,90.425) 69,89.925 69,88.795 69.475,88.32 DD5.5 ; v1(64.875,94.725) 64.875,97.1 v1(65.275,97.5)
  Top Layer w0.5: DD4.5 68.115,98.51 v1(68.225,98.4)
  Bottom Layer w0.2: v1(64.875,94.725) 64.875,92.856 66.831,90.9 68.025,90.9 v1(68.5,90.425)
  Bottom Layer w0.5: v1(65.275,97.5) 67.775,97.5 68.225,97.95 v1(68.225,98.4)
NetC2_1: C2.1 DD2.3 | length 2.3
  Top Layer w0.5: C2.1 71.525,98.325 71.935,97.915 DD2.3
NetC2_2: C2.2 DD2.1 | length 2.3
  Top Layer w0.5: C2.2 71.575,100.025 72.005,100.455 DD2.1
NetC3_1: C3.1 DD2.2 | length 4.9
  Top Layer w0.5: DD2.2 74.41,99.185 74.9,99.675 C3.1
NetC4_1: C4.1 DD2.5 | length 2.4
  Top Layer w0.5: C4.1 71.45,94.65 72.175,95.375 DD2.5
NetC4_2: C4.2 DD2.4 | length 2.2
  Top Layer w0.5: C4.2 71.725,96.35 72.02,96.645 DD2.4
NetC5_1: C5.1 DD2.6 | length 2.8
  Top Layer w0.5: C5.1 70.825,92.725 72.205,94.105 DD2.6
NetC17_2: C17.2 R6.2 VD8.2 VD9.2 VD10.3 VT1.3 VT2.2 | length 24.7
  Top Layer w0.5: 61.005,43.145 VT1.3 62.175,41.525 ; 63.076,41.45 VT2.2 65.775,41.45 ; 68.25,41.5 VD10.3 70.206,41.5 ; R6.2 76.15,41.5 VD8.2 ; 76.3,40.125 VD8.2 ; 79.4,40.6 VD9.2 ; C17.2 82.85,44.95 82.2,44.3 80.1,44.3 79.4,43.6 VD9.2 ; VD8.2 77.55,41.65 78.1,42.2 VD9.2
NetC22_2: C22.2 DA1.3 R11.2 | length 3.8
  Top Layer w0.5: C22.2 R11.2 62.376,64.574 62.655,64.295 DA1.3
NetDA1_1: DA1.1 DA1.7 DA1.8 R9.1 R10.1 | length 2.2
  Top Layer w0.5: R9.1 DA1.7
NetDA1_2: DA1.2 L1.2 R11.1 VD12.2 | length 5
  Top Layer w0.5: DA1.2 R11.1 63.925,67.875 64.125,68.075
  Top Layer w1: L1.2 L1.2@64.617,70.975
NetDA1_5: DA1.5 R12.2 R13.2 | length 10.7
  Top Layer w0.5: DA1.5 61.385,59.21 v2(61.625,59.45) ; R13.2 v1(68.25,60.213) R12.2
  Bottom Layer w0.5: v2(61.625,59.45) 61.6,59.425 62.388,60.213 v1(68.25,60.213)
NetDA2_4: DA2.4 R14.1 R15.2 | length 3.4
  Top Layer w0.5: DA2.4 R15.2 R14.1
NetDD3_10: DD3.10 DD5.1 | length 29.8
  Top Layer w0.2: v1(55.3,94.05) DD3.10 ; v1(61.65,87.675) 61.65,87.65 62.35,86.95 62.35,80.653 64.053,78.95 65.15,78.95 65.665,79.465 DD5.1
  Bottom Layer w0.2: v1(55.3,94.05) 55.3,95.725 55.675,96.1 59.919,96.1 60.525,95.494 60.525,91.7 61.65,90.575 v1(61.65,87.675)
NetDD3_18: DD3.18 FU4.2 | length 50.7
  Top Layer w0.2: DD3.18 53.875,91.4 v1(54.25,91.775) ; v1(53.675,85.425) 53.675,84.175 54.125,83.725 55.219,83.725 56.719,82.225 58.325,82.225 58.6,81.95 v1(58.6,81.7) ; v1(69.15,78.05) 70.025,78.05 70.55,77.525 70.55,76.734 71.08,76.205 71.08,75.82 v1(71.35,75.55)
  Top Layer w0.5: FU4.2 74.6,68.775 v1(74.65,68.825)
  Bottom Layer w0.2: v1(53.675,85.425) 53.6,85.5 53.6,87.425 52.45,88.575 52.45,90.7 53.525,91.775 v1(54.25,91.775) ; v1(58.6,81.7) 58.6,81.601 59.401,80.8 61.35,80.8 61.875,81.325 62.256,81.325 63.131,82.2 67.875,82.2 68.488,81.587 68.488,80.697 68.85,80.334 68.85,78.375 69.15,78.075 v1(69.15,78.05) ; v1(71.35,75.55) 72.05,74.85 74.275,74.85 75.1,74.025 75.1,69.275 v1(74.65,68.825)
NetDD3_19: DD3.19 FU3.2 | length 59.1
  Top Layer w0.2: DD3.19 54.05,90.9 v1(54.225,90.725) ; v1(54.5,84.6) 54.909,84.6 56.884,82.625 58.95,82.625 59.475,82.1 v1(59.475,81.575) ; v1(69.45,78.875) 70.25,78.875 70.95,78.175 70.95,76.9 v1(72.375,75.475)
  Top Layer w0.5: v1(73.4,65.75) 73.1,65.45 73.1,60.425 74.6,58.925 FU3.2 ; v1(75.5,68.075) 75.5,66.35 v1(75.875,65.975)
  Bottom Layer w0.2: v1(54.225,90.725) 53.125,90.725 52.85,90.45 52.85,88.741 54,87.591 54,86.25 54.525,85.725 54.525,84.625 v1(54.5,84.6) ; v1(59.475,81.575) 59.825,81.225 61.15,81.225 61.65,81.725 62.091,81.725 62.966,82.6 68.275,82.6 68.888,81.987 68.888,80.862 69.45,80.3 v1(69.45,78.875) ; v1(72.375,75.475) 74.225,75.475 75.5,74.2 v1(75.5,68.075) v1@75.525,68.05
  Bottom Layer w0.5: v1(73.4,65.75) 73.625,65.975 v1(75.875,65.975)
NetFU1_2: FU1.2 XP2.4 | length 11.4
  Top Layer w0.5: FU1.2 81.65,77.7 82.8,78.85 XP2.4
NetFU2_2: FU2.2 XP2.1 | length 13.1
  Top Layer w0.5: FU2.2 80.425,80.8 80.975,81.35 80.975,86.75 82.25,88.025 84.275,88.025 XP2.1
NetFU5_2: FU5.2 VD8.1 | length 3.4
  Top Layer w0.5: 76.3,44.2 VD8.1 ; FU5.2 77.4,47.275 77.9,46.775
NetJ3_2: J3.2 R16.1 | length 8.4
  Top Layer w0.5: J3.2 82.625,73.275 83.311,73.961 85.961,73.961 86.6,73.322 86.6,72.075 87.3,71.375 R16.1
NetR1_2: R1.2 VD6.2 | length 3.7
  Top Layer w0.5: VD6.2 89.515,43.565 89.8,43.85 R1.2
NetR2_2: R2.2 VD7.1 VD13.1 | length 27.4
  Top Layer w0.5: VD13.1 89.5,92.775 87.825,91.1 87.825,78.9 88.325,78.4 VD7.1 89.5,77 89.749,76.751 R2.2
NetR3_2: R3.2 XP4.2 | length 10.8
  Top Layer w0.5: XP4.2 53.245,109.7 59.425,109.7 60.025,109.1 R3.2
NetR6_1: R6.1 R7.1 VD11.3 | length 4.3
  Top Layer w0.5: VD11.3 71.875,47.625 72.375,47.125 R7.1
  Top Layer w0.8: R6.1 R7.1
NetR7_2: R7.2 VT2.1 | length 7
  Top Layer w0.5: VT2.1 v2(64.325,44.7) ; v2(68.225,46.275) 68.25,46.3 R7.2
  Bottom Layer w0.5: v2(64.325,44.7) 66.65,44.7 v2(68.225,46.275)
NetR8_1: R8.1 VD10.1 VT1.1 VT2.3 | length 18.5
  Top Layer w0.5: VT1.1@56.44,41.475 v2(58.45,41.475) ; R8.1 66.636,45.089 VT2.3 68.766,42.466 69.35,43.05 69.35,43.5 69.725,43.875 70.352,43.875 VD10.1
  Bottom Layer w0.5: v2(58.45,41.475) 64.225,41.475 64.4,41.3 v1(66.625,43.525)
NetVD1_1: VD1.1 VD2.1 VD4.1 | length 6.8
  Top Layer w0.5: VD2.1 73.623,73.95 VD4.1 VD1.1
NetVD1_2: VD1.2 VD3.2 VD4.2 | length 6.8
  Top Layer w0.5: VD1.2 VD4.2 75.727,73.95 VD3.2
RESET: C13.2 DD3.3 J1.1 R4.1 | length 25.7
  Top Layer w0.2: DD3.3 58.8,96.641 59.625,97.466 59.625,103.034 60.216,103.625 68.95,103.625 70.35,105.025
  Top Layer w0.5: R4.1 70.075,105.3 70.35,105.025 J1.1 C13.2
RS485_CON: DD3.34 R2.1 | length 40.7
  Top Layer w0.2: DD3.34 58.8,85.6 59.25,85.15 60.975,85.15 v1(61.6,85.775) ; v1(70.675,80.4) 71.3,79.775 71.3,78.956 71.75,78.506 71.75,77.575 72.025,77.3 v1(72.05,77.3) ; v1(76.8,74.975) 77.2,75.375 80.9,75.375 81.35,74.925 85.775,74.925 87.3,73.4 R2.1
  Bottom Layer w0.2: v1(61.6,85.775) 62.775,84.6 66.434,84.6 67.034,85.2 69.166,85.2 70.325,84.041 70.325,82.4 69.7,81.775 69.7,81.181 70.275,80.606 70.469,80.606 v1(70.675,80.4) ; v1(72.05,77.3) 73.65,77.3 75.975,74.975 v1(76.8,74.975)
RS_DIR: DD1.2 DD1.3 DD3.48 | length 22.4
  Top Layer w0.2: DD3.48 62.675,93.9 63,94.225 v1(63.35,94.225)
  Top Layer w0.5: DD1.3 73.88,86.48 74.675,87.275 v1(74.675,88.1) 74.325,87.75 DD1.2
  Bottom Layer w0.2: v1(63.35,94.225) 64.25,93.325 64.25,92.916 67.341,89.825 69.659,89.825 70.034,90.2 71.141,90.2 71.825,89.516 71.825,88.766 72.866,87.725 73.55,87.725 73.925,88.1 v1(74.675,88.1)
RS_RXD: DD1.1 DD2.9 DD3.46 XP4.3 | length 40.2
  Top Layer w0.2: XP4.3 55.97,103.725 v1(58.5,103.725) ; v1(60.225,102.5) 60.225,101.966 60.15,101.891 60.15,98.216 62.591,95.775 v1(62.925,95.775) ; DD3.46 62.775,92.9 63.275,92.4 v1(63.25,92.375)
  Top Layer w0.5: v1(70.75,89.025) 72.832,89.025 DD1.1 75.795,89.02 76.975,90.2 76.975,91.2 77.34,91.565 DD2.9
  Bottom Layer w0.2: v1(58.5,103.725) 59,103.725 v1(60.225,102.5) ; v1(62.925,95.775) 62.725,95.775 62.3,95.35 62.3,93.325 v1(63.25,92.375) 66.6,89.025 v1(70.75,89.025)
RS_TXD: DD1.4 DD2.10 DD3.47 R3.1 | length 46
  Top Layer w0.2: v1(61,103.025) 61,102.175 60.55,101.725 60.55,98.381 62.456,96.475 63.1,96.475 v1(63.825,95.75) ; DD3.47 63.2,93.4 v1(63.325,93.275) v1@63.375,93.325
  Top Layer w0.5: v1(59.675,104.8) 60.025,105.15 R3.1 ; v2(72.8,84.05) 72.837,84.087 DD1.4 ; v2(75.5,89.95) 75.55,89.95 76.05,90.45 76.05,91.6 77.285,92.835 DD2.10
  Bottom Layer w0.2: v1(59.675,104.8) 59.675,104.35 v1(61,103.025) ; v1(63.825,95.75) 63.775,95.8 63.525,95.55 63.525,95.526 62.7,94.701 62.7,93.9 v1(63.325,93.275) 67.175,89.425 69.825,89.425 70.2,89.8 70.975,89.8 71.425,89.35 71.425,88.6 72.925,87.1 73.975,87.1
  Bottom Layer w0.5: v2@72.675,84.025 73.975,85.325 73.975,87.1 74.225,87.35 74.986,87.35 75.5,87.864 v2(75.5,89.95)
SCK0: DD3.29
SCK1: DD3.13 DD4.6 DD5.6 | length 39.3
  Top Layer w0.2: v1(52.1,95.675) 51.55,95.125 51.55,94.1 51.75,93.9 DD3.13 ; v1(67.275,98.525) 67.625,98.175 67.625,95.7 v1(67.775,95.55) ; DD5.6 v1(68.205,87.895) ; v1(69.575,91.9) 69.575,90.791 69.843,90.523 69.843,89.084 70.55,88.376 v1(70.55,88.175)
  Top Layer w0.5: DD4.6 66.845,98.955 v1(67.275,98.525)
  Bottom Layer w0.2: v1(67.775,95.55) 66.625,94.4 66.625,92.5 67.225,91.9 v1(69.575,91.9) ; v1(68.205,87.895) 70.27,87.895 v1(70.55,88.175)
  Bottom Layer w0.5: v1(52.1,95.675) 54.95,98.525 v1(67.275,98.525)
SS1: DD3.2 DD4.1 | length 9.3
  Top Layer w0.2: DD3.2 59.3,96.575 60.05,97.325 60.475,97.325 62.8,95 63.45,95 64.305,94.145 DD4.1
VIN: FU5.1 XP1.3 XP2.2 XP2.5 XP3.3 | length 51.3
  Top Layer w1.5: FU5.1 XP1.3
  Bottom Layer w2: XP1.3 81.7,52.8 80.4,54.1 80.4,62.6 ; XP3.3 80.6,62.4 80.4,62.6 ; XP2.2 XP2.5 81,89.5 80.4,88.9 80.4,62.6
VIN_F: C18.2 C19.2 DA1.6 R9.2 R10.2 VT1.2 | length 2.7
  Top Layer w0.5: 62.1,55.2 62.655,55.755 DA1.6
XTALIN: C12.2 DD3.6 QR1.1 | length 7.6
  Top Layer w0.2: DD3.6 57.3,98 57,98.3 QR1.1 57,101 57.775,101.775 C12.2
XTALOUT: C11.2 DD3.7 QR1.2 | length 9.7
  Top Layer w0.2: C11.2 52.425,101.8 53,101.225 QR1.2 54.525,98.275 55.775,98.275 56.8,97.25 DD3.7
pads on no net: DD2.11 DD2.12 DD2.13 DD2.14 DD3.1 DD3.9 DD3.11 DD3.12 DD3.14 DD3.15 DD3.16 DD3.22 DD3.23 DD3.24 DD3.25 DD3.30 DD3.31 DD3.32 DD3.35 DD3.36 DD3.37 DD3.39 DD3.40 DD3.42 DD3.43 DD3.45 REP1.1 REP2.1 VD10.2 VD11.2 XP1.5 XP2.7 XP3.5 XP4.1 XP4.4 XP4.6

## Polygon pours and split planes (outlines as drawn)
GND on Top Layer "GND_L01_P028" (hatched 90Degree grid 0.2 track 0.5, remove dead copper, pour order 28): 49,110.3 92,110.3 92,39.3 49,39.3
VIN_F on Top Layer "VIN_F_L01_P008" (hatched 90Degree grid 0.2 track 0.5, remove dead copper, pour order 8): 64.25,52.125 62.85,53.525 49,53.525 49,39.3 55.3,39.3 55.3,42.5 56.1,43.3 62.2,43.3 64.25,45.35
NetDA1_2 on Top Layer "NETDA1_2_L01_P022" (hatched 90Degree grid 0.2 track 0.5, remove dead copper, pour order 22): 65.075,65.125 64.325,64.375 63.425,64.375 63,64.8 63,75.05 63.425,75.475 65.9,75.475 67.35,74.025 67.35,69.925 69.1,68.175 69.1,65.3 68.925,65.125
NetDA1_1 on Top Layer "NETDA1_1_L01_P012" (hatched 90Degree grid 0.2 track 0.5, remove dead copper, pour order 12): 63.3,54.625 66.875,54.625 67.45,55.2 67.45,56.35 66.775,57.025 66.775,64.225 66.225,64.775 65.05,64.775 64.55,64.275 64.55,62 63.3,60.75 63.3,59.425
VIN_F on Top Layer "VIN_F_L01_P010" (hatched 90Degree grid 0.2 track 0.5, remove dead copper, pour order 10): 49,56.9 58.675,56.9 59.9,55.675 62.125,55.675 63.15,54.65 67.25,54.65 67.925,53.975 67.925,52.075 67.175,51.325 66,51.325 65.7,51.025 65.7,49.25 65.05,48.6 49,48.6
NetC17_2 on Top Layer "NETC17_2_L01_P006" (hatched 90Degree grid 0.2 track 0.5, remove dead copper, pour order 6): 74.6,43.1 71.625,43.1 71.1,42.575 68.275,42.575 67.425,41.725 65.65,41.725 64.975,42.4 63,42.4 62,43.4 60.625,43.4 59.6,42.375 59.6,39.3 74.25,39.3 74.8,39.85
+3V3 on Top Layer "+3V3_L01_P026" (hatched 90Degree grid 0.2 track 0.5, remove dead copper, pour order 26): 67.55,87.85 66.95,88.45 65.225,88.45 62.875,86.1 62.875,84.325 63.425,83.775 65.975,83.775 67.55,85.35
+3V3 on Top Layer "+3V3_L01_P024" (hatched 90Degree grid 0.2 track 0.5, remove dead copper, pour order 24): 65.35,102.475 72.025,102.475 73.55,104 77.2,104 77.65,103.55 77.65,101.725 74.1,101.725 72.4,100.025 66.425,100.025 65.45,101
+3V3 on Top Layer "+3V3_L01_P020" (hatched 90Degree grid 0.2 track 0.5, remove dead copper, pour order 20): 75.775,100.275 76.425,99.625 79.85,99.625 80.35,100.125 80.35,102.475 79.575,103.25 77.95,103.25 77.5,103.7 75.875,103.7 75.775,103.6
+3V3 on Top Layer "+3V3_L01_P018" (hatched 90Degree grid 0.2 track 0.5, remove dead copper, pour order 18): 66.2,101.625 65.35,102.475 62.425,102.475 61.875,102 61.875,100.125 61.875,99.2 62.925,99.2 63.5,98.625 66.2,98.625
+3V3 on Top Layer "+3V3_L01_P016" (hatched 90Degree grid 0.2 track 0.5, remove dead copper, pour order 16): 57.025,78.375 57.3,78.1 57.3,77.1 57.625,76.775 58.725,76.775 59.125,77.175 59.125,80.7 58.25,80.7 56.35,80.7 55.425,80.4 55.425,78.375
+5V on Top Layer "+5V_L01_P014" (hatched 90Degree grid 0.2 track 0.5, remove dead copper, pour order 14): 51.05,75 51.05,73.35 51.05,67.475 51.85,66.675 60.05,66.675 61,67.625 61,75
NetC17_2 on Top Layer "NETC17_2_L01_P004" (hatched 90Degree grid 0.2 track 0.5, remove dead copper, pour order 4): 81.3,43.6 82.2,43.6 84.1,45.5 84.1,47.6 83.7,48 82.3,48 81.4,47.1 81.4,46 80.9,46 79.3,44.4
NetC17_2 on Top Layer "NETC17_2_L01_P002" (hatched 90Degree grid 0.2 track 0.5, remove dead copper, pour order 2): 77.7,43.1 78.9,44.3 80.6,44.3 81.3,43.6 81.3,40.5 80.5,39.7 74.8,39.7 74.5,40 74.5,43.1
NetFU5_2 on Top Layer "NETFU5_2_L01_P000" (hatched 90Degree grid 0.2 track 0.5, remove dead copper, pour order 0): 80.3,49.8 81.2,48.9 81.2,47 78.2,44 74.8,44 74,44.8 74,49.4 74.4,49.8
GND on Bottom Layer "GND_L02_P030" (hatched 90Degree grid 0.2 track 0.5, remove dead copper, pour order 30): 49,110.3 92,110.3 92,39.3 49,39.3

## Keep-outs
Keep-Out Layer:
  the board outline again, w0.2

## Other copper
Top Layer:
  pour cut-out: 60.75,75 63.05,75 63.05,67.375 61.15,67.375 60.75,67.775
  pour cut-out: 75.125,49.5 75.125,51.7 79.625,51.7 79.625,49.5
  pour cut-out: 75.525,58.059 76.9,58.059 76.9,55.684 75.525,55.684
  pour cut-out: 75.525,64.925 76.9,64.925 76.9,62.55 75.525,62.55
  pour cut-out: 77.25,78.913 78.625,78.913 78.625,76.537 77.25,76.537
  pour cut-out: 77.25,82 78.625,82 78.625,79.625 77.25,79.625
  pour cut-out: 55.175,78.925 55.725,78.925 55.725,78.175 55.625,78.075 55.55,78.15 55.15,78.15 55.15,78.4 54.975,78.575

## Silkscreen, mask and mechanical layers (free items; w line width, h text height)
Top Overlay:
  circle w0.3: c49.725,103.1 r0.09
  text "RST" at 71.125,102.5 h0.8
  text "ISP" at 63.725,102.475 h0.8
  text "RS232" at 86.9,97.95 h0.8 r90
  text "RS02" at 84.725,97 h1.5 r90
  text "ACTIVITY" at 88.125,96.825 h0.8 r90
  text "RS485" at 86.9,77.825 h0.8 r90
  text "RF02" at 84.725,77.175 h1.5 r90
  text "ACTIVITY" at 88.125,76.7 h0.8 r90
  text "120E" at 82.05,69.525 h1
Mechanical 1:
  lines w0.002: 79.4,42.3 98.6,42.3 ; 81.7,49.5 81.7,53.55 81.7,55.05 81.7,59.1 81.7,63.15 81.7,64.65 81.7,68.7 ; 81.7,88.75 81.7,90.25 81.7,103.3 ; 94.2,53.55 94.2,55.05 ; 94.2,63.15 94.2,64.65 ; 94.2,88.75 94.2,90.25 ; 89,40.8 89,43.8 94.2,43.8 cw(c94.2,42.3) 94.2,40.8 89,40.8
  lines w0.1: 81.7,49.5 94.2,49.5 94.2,53.55 81.7,53.55 ; 81.7,55.05 94.2,55.05 94.2,59.1 ; 81.7,59.1 94.2,59.1 ; 81.7,63.15 94.2,63.15 94.2,59.1 ; 81.7,64.65 94.2,64.65 94.2,68.7 81.7,68.7 ; 81.7,90.25 94.2,90.25 94.2,103.3 81.7,103.3 ; 92,48.301 82,48.301 cw(c82,49.301) 81,49.301 81,68.899 cw(c82,68.899) 82,69.899 92,69.899 ; 92,49.001 82,49.001 cw(c82,49.301) 81.7,49.301 81.7,68.899 cw(c82,68.899) 82,69.199 92,69.199 ; 92,74.501 82,74.501 cw(c82,75.501) 81,75.501 81,103.499 cw(c82,103.499) 82,104.499 92,104.499 ; 92,75.201 82,75.201 cw(c82,75.501) 81.7,75.501 81.7,103.499 cw(c82,103.499) 82,103.799 92,103.799 ; 81.7,75.7 81.7,88.75 94.2,88.75 94.2,75.7 81.7,75.7
Mechanical 2:
  lines w0.1: 86.632,37.809 87.207,38.384 87.207,38.409 ; 87.207,35.459 87.207,38.409 ; 87.807,37.809 87.207,38.409 ; 114.507,54.534 114.157,54.884 ; 114.607,55.359 114.132,54.884 ; 116.732,54.884 114.132,54.884 ; 87.207,38.409 87.207,38.409 ; 114.132,54.884 114.157,54.884 ; 114.132,54.884 114.132,54.884 ; 114.157,54.884 114.157,54.884 ; 112.332,54.259 112.332,55.109 113.082,55.109 cw(c113.109,54.684) 113.082,54.259 112.332,54.259
  lines w0.2: 110.957,50.184 110.957,51.359 110.957,54.659 112.307,54.659 ; 102.007,51.184 112.307,51.184 112.307,52.459 102.007,52.459 102.007,51.184
  text "Монтаж VD6" at 99.857,63.884 h3
  text "Монтаж производить" at 98.082,61.984 h2
  text "в сторону края платы B" at 97.482,59.784 h2
  text "A" at 107.082,55.559 h1.52
  text "B" at 115.332,55.534 h1.52
  text "B" at 92.707,42.484 h1.52
  text "A" at 88.432,35.734 h1.52

## Dimensions
112.307,52.459 to 113.535,54.684 on Mechanical 2
110.957,54.659 to 112.307,52.459 on Mechanical 2